# EAGLE board DAWA 6.1-MAIN (EAGLE 9.2.1), part 1 of 2
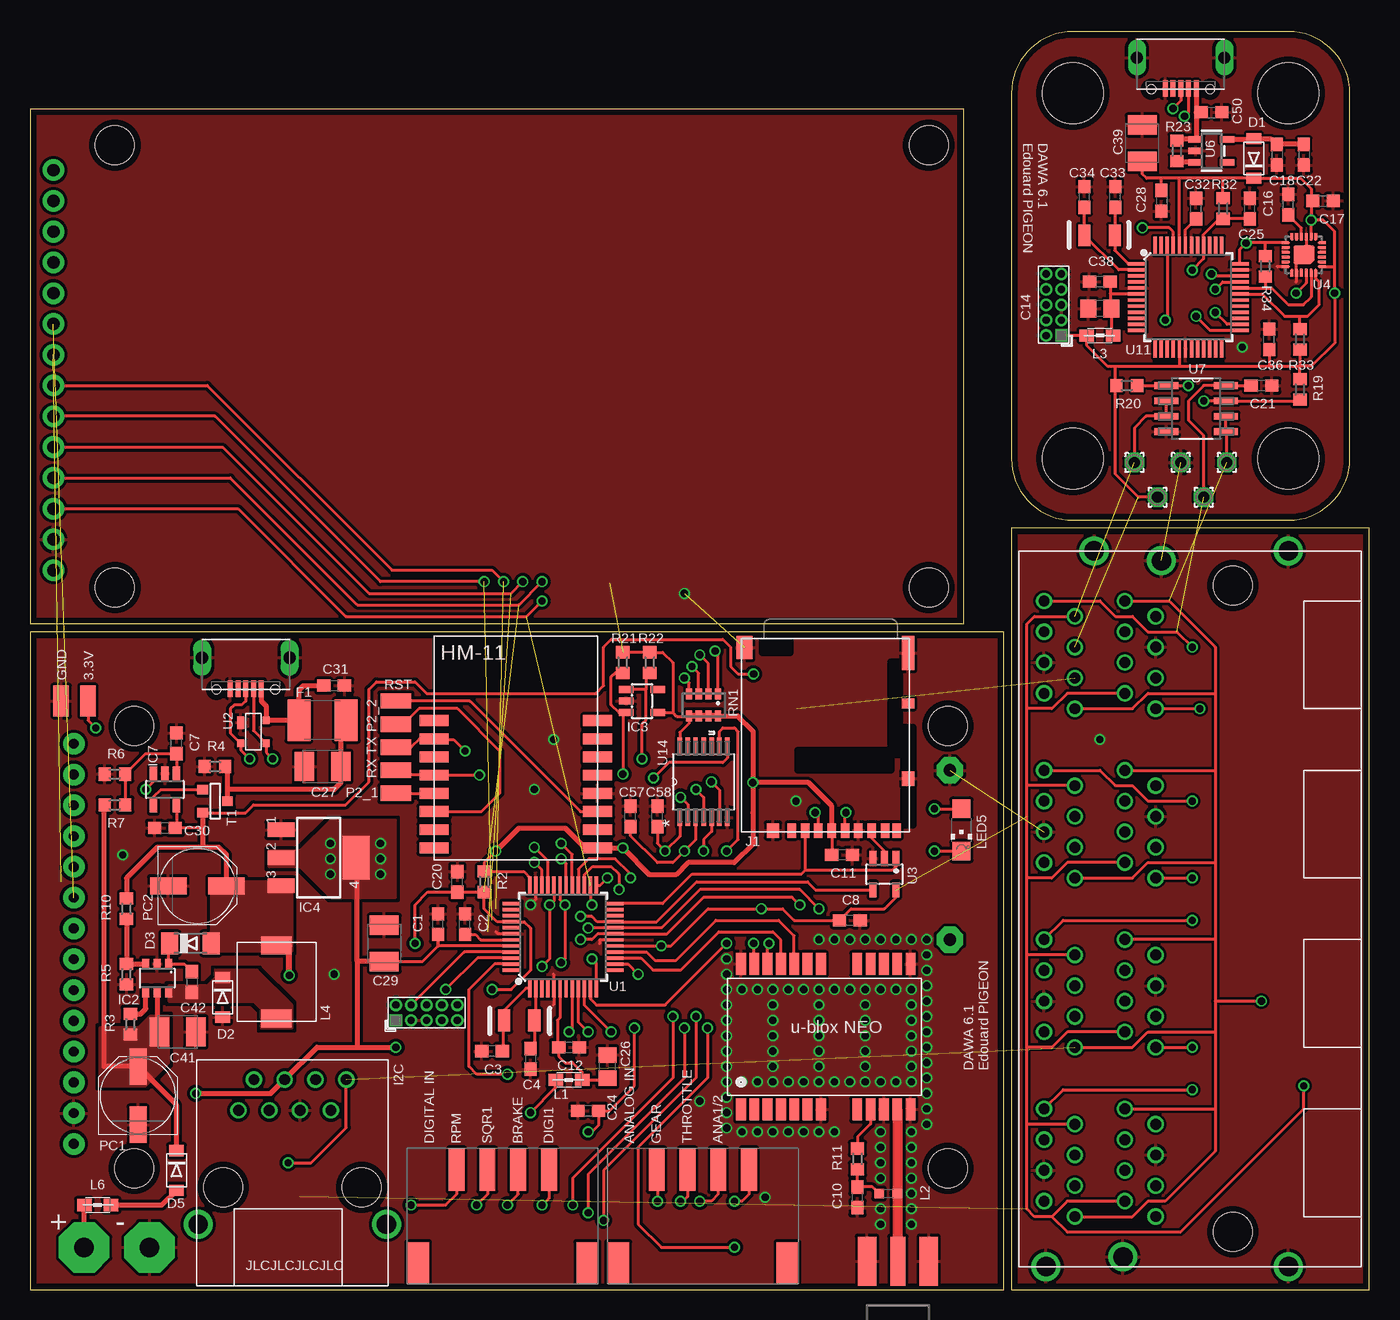
[diagram p0: board, top side]
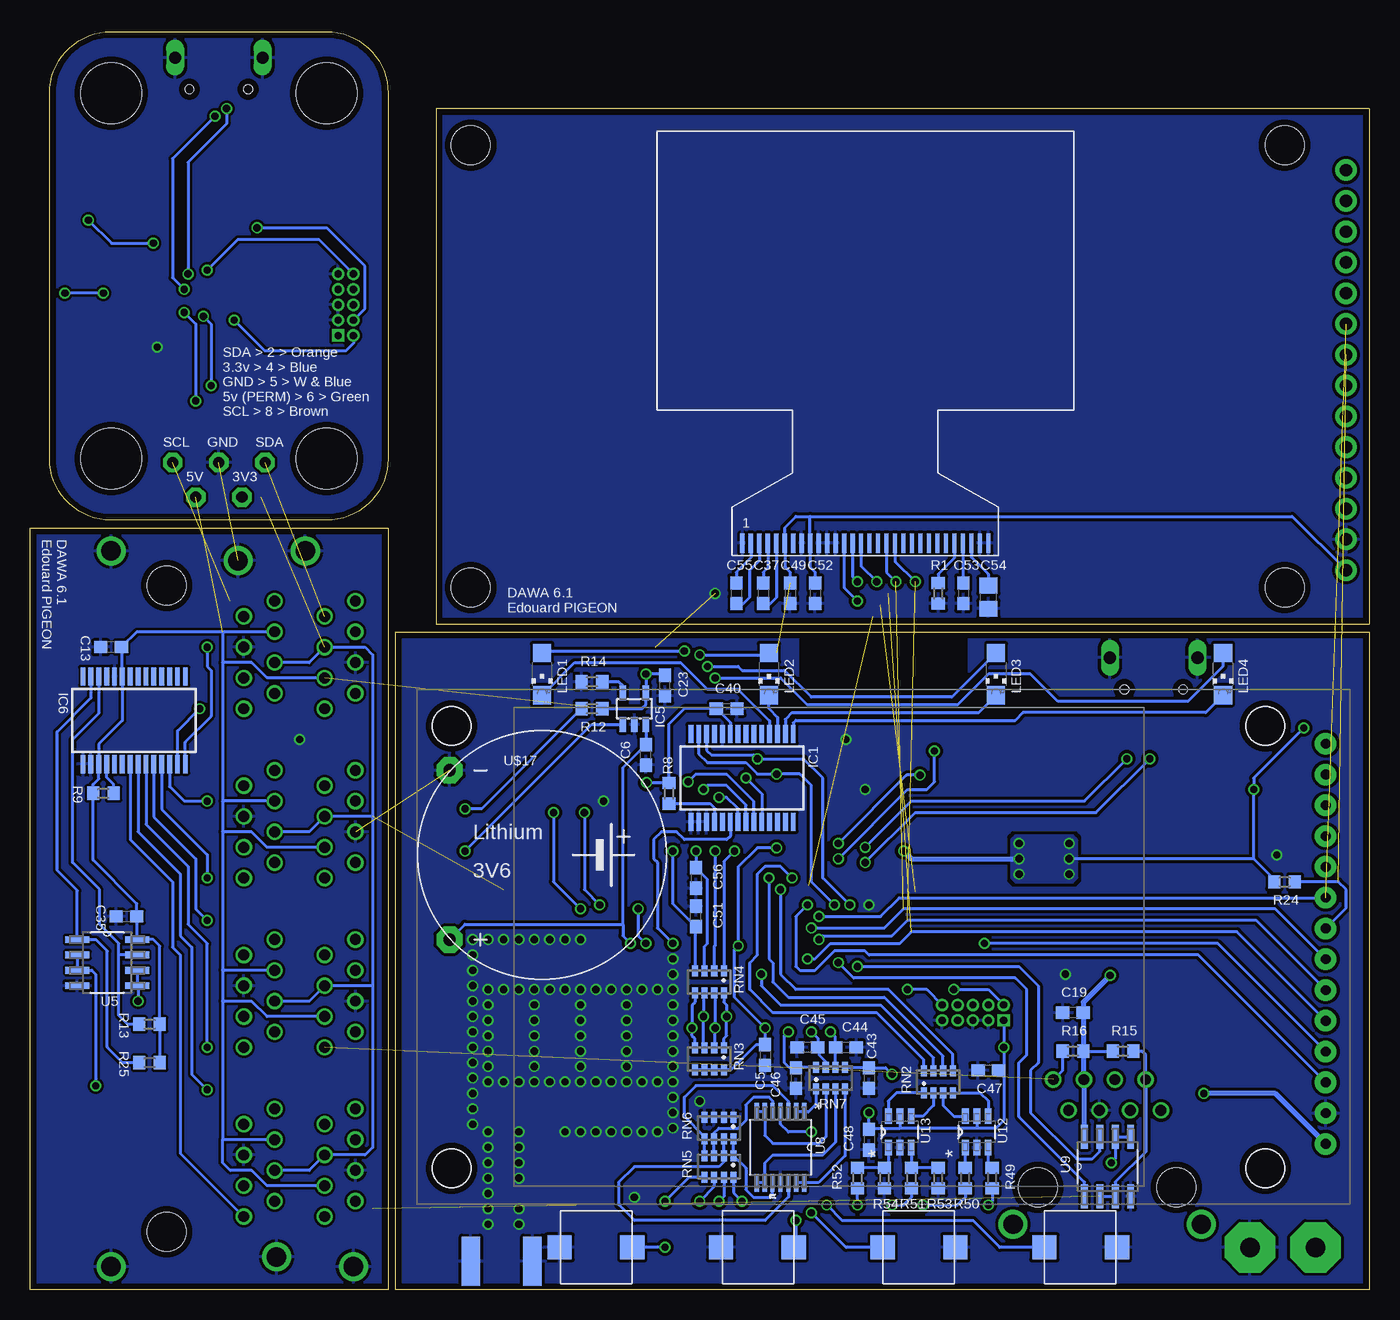
[diagram p1: board, bottom side, seen from below]

Size 110.49 x 103.82 mm. Coordinates in mm from the lower left corner, seen from the top.
Outline: 0.01,97.47 0.01,54.94
Outline: 0,97.47 76.99,97.47 76.99,54.93 0,54.93
Outline: 80.33,54.29 0.01,54.29 0.01,0.01 80.33,0.01 80.33,54.29
Outline: 80.96,62.87 80.96,0 110.49,0 110.49,62.87 80.96,62.87
Outline: 86.04,103.82 arc90 80.96,98.74 80.96,68.58 arc90 86.04,63.5 103.82,63.5 arc90 108.9,68.58 108.9,98.74 arc90 103.82,103.82 86.04,103.82
Copper layers (1*16): Top 0.035mm / dielectric 1.6mm / Bottom 0.035mm
Design rules "Elecrow_2-layer_PCB_eagle_rule *": minimum track width 6mil, minimum drill 12mil, track to track 6mil, track to pad 6mil, pad to pad 6mil, via to via 6mil, smd to smd 0mil, copper to edge 20mil, drill to drill 10mil, minimum pad ring 6mil, minimum via ring 6mil, stop-mask expansion 0mil, vias tented up to drill 100mil, thermal gap 10mil
Net classes: 0 default: width 0.203 mm, drill 0.406 mm, clearance 0.203 mm; 3 usbvcc: width 0.203 mm, drill 0.406 mm, clearance 0.203 mm; 4 USBpair: width 0.254 mm, drill 0.406 mm, clearance 0.61 mm
Holes 3.2 mm at 8.57,46.51 8.57,10 75.72,10 75.72,46.51 6.99,94.46 6.99,57.94 74.14,57.94 74.14,94.46
Holes 5 mm at 103.82,98.74 86.04,98.74 103.82,68.58 86.04,68.58

## Footprints (pad centres in the part's own frame; a part is rotated, then mirrored left to right if it is on the bottom)
SMD1,27-2,54 = smd 1.27 x 2.54: 1 0,0
4,16O1,6 = drill 1.6 pad 4.166 octagon: 1 0,0
C0603 = smd 1.1 x 1: 1 -0.85,0; 2 0.85,0
C0805 = smd 1.3 x 1.5: 1 -0.95,0; 2 0.95,0
SMC_B = smd 1.6 x 2.4: + -1.5,0; - 1.5,0
USB-MINIB-DAWA = smd 0.406 x 1.372: D+ 0,4.381; D- -0.641,4.381; GND 1.282,4.381; ID 0.641,4.381; VBUS -1.282,4.381 | drill 1 long: GND1 -3.612,1.826; GND2 3.612,1.826 | hole 0.7: -2.421,4.445; 2.421,4.445
SOD-123FL = smd 0.91 x 1.22: A 1.637,0; C -1.637,0
MINIMELF = smd 1.4 x 1.8: A 1.7,0; C -1.7,0
L1812 = smd 1.9 x 3.4: 1 -1.95,0; 2 1.95,0
SSOP28 = smd 0.4 x 1.5: 1 -4.225,-3.625; 2 -3.575,-3.625; 3 -2.925,-3.625; 4 -2.275,-3.625; 5 -1.625,-3.625; 6 -0.975,-3.625; 7 -0.325,-3.625; 8 0.325,-3.625; 9 0.975,-3.625; 10 1.625,-3.625; 11 2.275,-3.625; 12 2.925,-3.625; 13 3.575,-3.625; 14 4.225,-3.625; 15 4.225,3.625; 16 3.575,3.625; 17 2.925,3.625; 18 2.275,3.625; 19 1.625,3.625; 20 0.975,3.625; 21 0.325,3.625; 22 -0.325,3.625; 23 -0.975,3.625; 24 -1.625,3.625; 25 -2.275,3.625; 26 -2.925,3.625; 27 -3.575,3.625; 28 -4.225,3.625
SOT23-6 = smd 0.6 x 0.9: 1 -0.95,-1.15; 2 0,-1.15; 3 0.95,-1.15; 4 0.95,1.15; 5 0,1.15; 6 -0.95,1.15
SOT23-5L = smd 0.55 x 1.2: 1 -0.95,-1.3; 2 0,-1.3; 3 0.95,-1.3; 4 0.95,1.3; 5 -0.95,1.3
SOT223 = smd 1.219 x 2.235: 1 -2.311,-3.099; 2 0,-3.099; 3 2.311,-3.099 | smd 3.6 x 2.2: 4 0,3.099
SOT23-5 = smd 0.6 x 1.2: 1 -0.95,-1.306; 2 0,-1.306; 3 0.95,-1.306; 4 0.95,1.306; 5 -0.95,1.306
DM3AT-SF-PEJM5 = smd 0.7 x 1.2: 1 3.2,-0.1; 2 2.1,-0.1; 3 1,-0.1; 4 -0.1,-0.1; 5 -1.2,-0.1; 6 -2.3,-0.1; 7 -3.4,-0.1; 8 -4.5,-0.1; B -5.45,-0.1 | smd 1 x 0.8: A -6.4,-10.6 | smd 1 x 1.2: MOUNT0 4.75,-0.1; MOUNT1 -6.4,-4.4 | smd 1 x 2.8: MOUNT2 -6.4,-14.75 | smd 1.3 x 1.9: MOUNT3 7.1,-15.2
1X14-CB = drill 1.016 pad 1.778: 1 -16.51,0; 2 -13.97,0; 3 -11.43,0; 4 -8.89,0; 5 -6.35,0; 6 -3.81,0; 7 -1.27,0; 8 1.27,0; 9 3.81,0; 10 6.35,0; 11 8.89,0; 12 11.43,0; 13 13.97,0; 14 16.51,0
PINHEAD_2X05_127 = drill 0.6 pad 1.016 square: 1 -0.635,2.54 | drill 0.6 pad 1.016: 2 0.635,2.54; 3 -0.635,1.27; 4 0.635,1.27; 5 -0.635,0; 6 0.635,0; 7 -0.635,-1.27; 8 0.635,-1.27; 9 -0.635,-2.54; 10 0.635,-2.54
0805 = smd 1.2 x 1: 1 -1.1,0; 2 1.1,0
L0603 = smd 0.8 x 0.8: 1 -0.762,0; 2 0.762,0
SRR0604 = smd 1.5 x 2.5: P$1 3,0; P$2 -3,0
CHIPLED_1206 = smd 1.5 x 1.5: A 0,-1.75; C 0,1.75
1,6/0,9 = drill 0.914 pad 1.6 octagon: 1 0,0
PANASONIC_D = smd 3 x 1.4: + 2.4,0; - -2.4,0
R0603 = smd 1 x 1.1: 1 -0.85,0; 2 0.85,0
RJ45 = drill 1.6: P$1 5.08,0.13; P$2 5.08,15.67 | drill 0.9: P$3 17.02,11.075; P$4 17.02,3.455; P$5 17.02,5.995; P$6 14.48,4.725; P$7 14.48,7.265; P$8 14.48,12.345; P$9 14.48,9.805; P$10 17.02,8.535 | hole 3.2: 8.14,2.185; 8.14,13.615
742-8NS = smd 0.5 x 0.9: 1 -1.2,-0.9; 2 -0.4,-0.9; 3 0.4,-0.9; 4 1.2,-0.9; 5 1.2,0.9; 6 0.4,0.9; 7 -0.4,0.9; 8 -1.2,0.9
SOT-23 = smd 0.787 x 0.889: 1 0.025,-1.016; 2 -0.94,1.016; 3 0.991,1.016
TQFP-48 = smd 1.5 x 0.28: 1 -4.25,2.75; 2 -4.25,2.25; 3 -4.25,1.75; 4 -4.25,1.25; 5 -4.25,0.75; 6 -4.25,0.25; 7 -4.25,-0.25; 8 -4.25,-0.75; 9 -4.25,-1.25; 10 -4.25,-1.75; 11 -4.25,-2.25; 12 -4.25,-2.75; 25 4.25,-2.75; 26 4.25,-2.25; 27 4.25,-1.75; 28 4.25,-1.25; 29 4.25,-0.75; 30 4.25,-0.25; 31 4.25,0.25; 32 4.25,0.75; 33 4.25,1.25; 34 4.25,1.75; 35 4.25,2.25; 36 4.25,2.75 | smd 0.28 x 1.5: 13 -2.75,-4.25; 14 -2.25,-4.25; 15 -1.75,-4.25; 16 -1.25,-4.25; 17 -0.75,-4.25; 18 -0.25,-4.25; 19 0.25,-4.25; 20 0.75,-4.25; 21 1.25,-4.25; 22 1.75,-4.25; 23 2.25,-4.25; 24 2.75,-4.25; 37 2.75,4.25; 38 2.25,4.25; 39 1.75,4.25; 40 1.25,4.25; 41 0.75,4.25; 42 0.25,4.25; 43 -0.25,4.25; 44 -0.75,4.25; 45 -1.25,4.25; 46 -1.75,4.25; 47 -2.25,4.25; 48 -2.75,4.25
SOT-143B = smd 1 x 0.6: 1 -0.75,-1.05 | smd 0.6 x 0.6: 2 0.95,-1.05; 3 0.95,1.05; 4 -0.95,1.05
SOT23-5' = smd 0.55 x 1.2: 1 -0.95,-1.3; 2 0,-1.3; 3 0.95,-1.3; 4 0.95,1.3; 5 -0.95,1.3
QFN24_PAD = smd 0.5 x 0.25: 1 -1.55,1; 2 -1.55,0.6; 3 -1.55,0.2; 4 -1.55,-0.2; 5 -1.55,-0.6; 6 -1.55,-1; 13 1.55,-1; 14 1.55,-0.6; 15 1.55,-0.2; 16 1.55,0.2; 17 1.55,0.6; 18 1.55,1 | smd 0.08 x 0.13: 1$1 -1.32,1.06; 1$3 -1.26,0.94; P$33 1.26,-0.94; P$34 1.32,-1.06; P$58 1.26,0.94; P$59 1.32,1.06; P$68 -1.26,-0.94; P$69 -1.32,-1.06 | smd 0.1 x 0.185 rotated 45: 1$2 -1.25,1.024; P$49 1.024,-1.25 | smd 0.14 x 0.14: 1$4 -1.22,0.945; P$23 -0.945,-1.22; P$24 1.22,-0.945; P$36 0.945,1.22; P$51 0.945,-1.22; P$56 1.22,0.945; P$61 -0.945,1.22; P$66 -1.22,-0.945 | smd 0.05 x 0.05: 1$5 -1.175,0.97; P$25 -0.97,-1.175; P$31 1.175,-0.97; P$37 0.97,1.175; P$52 0.97,-1.175; P$57 1.175,0.97; P$62 -0.97,1.175; P$67 -1.175,-0.97 | smd 0.25 x 0.5: 7 -1,-1.55; 8 -0.6,-1.55; 9 -0.2,-1.55; 10 0.2,-1.55; 11 0.6,-1.55; 12 1,-1.55; 19 1,1.55; 20 0.6,1.55; 21 0.2,1.55; 22 -0.2,1.55; 23 -0.6,1.55; 24 -1,1.55 | smd 0.25 x 0.25: CENTER 0,0 | smd 0.4 x 0.4: DBBADFE -0.675,0.24 | smd 0.6 x 1.2: DBBADFE1 -0.575,-0.195 | smd 0.25 x 0.3: P$1 -0.2,1.3; P$3 0.2,1.3; P$5 0.6,1.3; P$11 -0.6,1.3; P$16 0.2,-1.3; P$18 -0.2,-1.3; P$20 -0.6,-1.3; P$26 0.6,-1.3 | smd 0.3 x 0.25: P$2 -1.3,0.2; P$4 -1.3,0.6; P$28 -1.3,-0.2; P$38 -1.3,-0.6; P$40 1.3,0.2; P$42 1.3,-0.2; P$44 1.3,-0.6; P$50 1.3,0.6 | smd 0.1 x 0.185 rotated 225: P$7 1.25,-1.024; P$60 -1.024,1.25 | smd 1.1 x 1.59: P$13 0.325,0 | smd 0.3 x 0.5 rotated 315: P$14 -0.592,0.512 | smd 0.5 x 1.59: P$15 -0.27,0 | smd 0.1 x 0.185 rotated 135: P$22 -1.024,-1.25; P$55 1.25,1.024 | smd 0.13 x 0.08: P$27 -0.94,-1.26; P$29 -1.06,-1.32; P$39 0.94,1.26; P$41 1.06,1.32; P$53 0.94,-1.26; P$54 1.06,-1.32; P$63 -0.94,1.26; P$64 -1.06,1.32 | smd 0.1 x 0.185 rotated 315: P$35 1.024,1.25; P$65 -1.25,-1.024
SOIC127P600X175-8N = smd 1.981 x 0.559: 1 -2.464,1.905; 2 -2.464,0.635; 3 -2.464,-0.635; 4 -2.464,-1.905; 5 2.464,-1.905; 6 2.464,-0.635; 7 2.464,0.635; 8 2.464,1.905
SOP65P640X120-14N = smd 1.473 x 0.356: 1 -2.921,1.956; 2 -2.921,1.295; 3 -2.921,0.66; 4 -2.921,0; 5 -2.921,-0.66; 6 -2.921,-1.295; 7 -2.921,-1.956; 8 2.921,-1.956; 9 2.921,-1.295; 10 2.921,-0.66; 11 2.921,0; 12 2.921,0.66; 13 2.921,1.295; 14 2.921,1.956
SOT95P280X145-6N = smd 1.27 x 0.559: 1 -1.295,0.94; 2 -1.295,0; 3 -1.295,-0.94; 4 1.295,-0.94; 5 1.295,0; 6 1.295,0.94
OSCILLATOR_SMD = smd 1 x 1.8: 1 0,0; 2 2.5,0
HM-11 = smd 2.4 x 0.9: GND 6.5,0; NC@5 -7,0; NC@6 -7,-1.5; NC@7 -7,-3; NC@8 -7,-4.5; NC@10 6.5,-3; PIO0 6.5,6; PIO1 6.5,4.5; PIO2 6.5,3; PIO3 6.5,1.5; RESETB 6.5,-1.5; UART_CTS -7,3; UART_RTS -7,6; UART_RX -7,1.5; UART_TX -7,4.5; VCC 6.5,-4.5
NEO-M8 = smd 1.8 x 0.8: 1 6.4,-7.4; 2 6.4,-6.3; 3 6.4,-5.2; 4 6.4,-4.1; 5 6.4,-3; 6 6.4,-1.9; 7 6.4,-0.8; 8 6.4,2.2; 9 6.4,3.3; 10 6.4,4.4; 11 6.4,5.5; 12 6.4,6.6; 13 -5.6,6.6; 14 -5.6,5.5; 15 -5.6,4.4; 16 -5.6,3.3; 17 -5.6,2.2; 18 -5.6,-0.8; 19 -5.6,-1.9; 20 -5.6,-3; 21 -5.6,-4.1; 22 -5.6,-5.2; 23 -5.6,-6.3; 24 -5.6,-7.4
TFT_2.4 = drill 0.8 pad 1.778: TFT_CS -32.42,2; TFT_DC -27.34,2; TFT_GND -34.96,2; TFT_LED -19.72,2; TFT_RESET -29.88,2; TFT_SCK -22.26,2; TFT_SDI(MOSI) -24.8,2; TFT_SDO(MISO) -17.18,2; TFT_T_CLK -14.64,2; TFT_T_CS -12.1,2; TFT_T_DIN -9.56,2; TFT_T_DO -7.02,2; TFT_T_IRQ -4.48,2; TFT_VCC -37.5,2
SKPMAPE10 = smd 2 x 2: P$1 -3,0; P$2 3,0
4_PIN_JST-XH-SMD = smd 1.3 x 3.5: 1 6.604,-0.254; 2 4.064,-0.254; 3 1.524,-0.254; 4 -1.016,-0.254 | smd 1.8 x 3.4: P$1 9.779,-7.938; P$2 -4.191,-7.938
1X30-0.7MM = smd 0.35 x 1.6: 1 -10.15,0; 2 -9.45,0; 3 -8.75,0; 4 -8.05,0; 5 -7.35,0; 6 -6.65,0; 7 -5.95,0; 8 -5.25,0; 9 -4.55,0; 10 -3.85,0; 11 -3.15,0; 12 -2.45,0; 13 -1.75,0; 14 -1.05,0; 15 -0.35,0; 16 0.35,0; 17 1.05,0; 18 1.75,0; 19 2.45,0; 20 3.15,0; 21 3.85,0; 22 4.55,0; 23 5.25,0; 24 5.95,0; 25 6.65,0; 26 7.35,0; 27 8.05,0; 28 8.75,0; 29 9.45,0; 30 10.15,0
LI_3.6 = drill 1.016 pad 2.159 octagon: + -7.62,-6.985; - -7.62,6.985
RJ45X8 = drill 0.9: P$1 13.018,22.701; P$2 11.748,20.161; P$3 10.477,22.701; P$4 9.207,20.161; P$5 7.938,22.701; P$6 6.668,20.161; P$7 5.397,22.701; P$8 4.128,20.161; P$9 26.988,22.701; P$10 25.718,20.161; P$11 24.448,22.701; P$12 23.177,20.161; P$13 21.907,22.701; P$14 20.637,20.161; P$15 19.367,22.701; P$16 18.098,20.161; P$17 40.958,22.701; P$18 39.688,20.161; P$19 38.417,22.701; P$20 37.148,20.161; P$21 35.877,22.701; P$22 34.608,20.161; P$23 33.337,22.701; P$24 32.068,20.161; P$25 54.928,22.701; P$26 53.657,20.161; P$27 52.388,22.701; P$28 51.117,20.161; P$29 49.847,22.701; P$30 48.578,20.161; P$31 47.307,22.701; P$32 46.038,20.161; P$33 4.128,13.494; P$34 5.397,16.034; P$35 6.668,13.494; P$36 7.938,16.034; P$37 9.207,13.494; P$38 10.477,16.034; P$39 11.748,13.494; P$40 13.018,16.034; P$41 18.098,13.494; P$42 19.367,16.034; P$43 20.637,13.494; P$44 21.907,16.034; P$45 23.177,13.494; P$46 24.448,16.034; P$47 25.718,13.494; P$48 26.988,16.034; P$49 32.068,13.494; P$50 33.337,16.034; P$51 34.608,13.494; P$52 35.877,16.034; P$53 37.148,13.494; P$54 38.417,16.034; P$55 39.688,13.494; P$56 40.958,16.034; P$57 46.038,13.494; P$58 47.307,16.034; P$59 48.578,13.494; P$60 49.847,16.034; P$61 51.117,13.494; P$62 52.388,16.034; P$63 53.657,13.494; P$64 54.928,16.034 | drill 1.6: P$67 0,22.543; P$68 0.794,16.192; P$69 0,2.54; P$70 59.055,2.54; P$71 58.261,13.018; P$72 59.055,18.574 | hole 3.2: 2.857,7.144; 56.197,7.144
SMA_EDGELAUNCH = smd 4.064 x 1.524: GND@1 2.032,-2.54; GND@2 2.032,2.54 | smd 4.064 x 1.524 bottom: GND@3 2.032,2.54; GND@4 2.032,-2.54 | smd 4.064 x 1.27: P 2.032,0

## Placement (x,y rotation side)
3.3V  WIREPADSMD1,27-254  [SMD1,27-2,54]  4.76,48.58 180 top
+  WIREPAD4,16O1,6  [4,16O1,6]  4.45,3.49 0 top
-  WIREPAD4,16O1,6  [4,16O1,6]  9.84,3.49 0 top
C1  100nF  [C0603]  33.66,30.16 90 top
C2  100nF  [C0603]  35.88,30.16 90 top
C3  22pF  [C0603]  38.1,19.68 180 top
C4  22pF  [C0603]  41.27,19.05 270 top
C5  100nF  [C0603]  49.85,19.37 270 bottom
C6  4.7µF  [C0603]  59.69,44.13 90 bottom
C7  100nF  [C0603]  12.06,45.09 90 top
C8  4.7µF  [C0603]  67.63,30.48 180 top
C10  47pF  [C0603]  68.26,7.62 90 top
C11  100nF  [C0603]  66.99,35.88 180 top
C12  100nF  [C0603]  44.45,20 0 top
C13  100nF  [C0603]  103.82,53.02 180 bottom
C14  10µF  [C0805]  88.27,80.96 180 top
C16  100nF  [C0603]  103.82,89.53 90 top
C17  100nF  [C0603]  106.68,89.85 0 top
C18  10µF  [C0603]  102.87,93.66 270 top
C19  100nF  [C0603]  24.45,22.86 180 bottom
C20  100nF  [C0603]  35.24,33.66 90 top
C21  100nF  [C0603]  101.6,74.61 0 top
C22  1µF  [C0603]  105.09,93.66 270 top
C23  4.7µF  [C0603]  58.1,49.85 90 bottom
C24  100nF  [C0603]  46.04,14.76 0 top
C25  100nF  [C0603]  100.65,89.22 90 top
C26  10µF  [C0805]  47.62,18.41 90 top
C27  10µF  [SMC_B]  24.13,43.18 180 top
C28  100nF  [C0603]  93.34,89.85 270 top
C29  10µF  [SMC_B]  29.21,28.57 90 top
C30  100nF  [C0603]  11.11,38.1 180 top
C31  10nF  [C0603]  25.08,49.85 0 top
C32  1µF  [C0603]  96.2,89.22 90 top
C33  22pF  [C0603]  89.53,90.17 90 top
C34  22pF  [C0603]  87,90.17 90 top
C35  100nF  [C0603]  102.55,30.8 180 bottom
C36  100nF  [C0603]  102.23,78.42 90 top
C37  2.2µF  [C0603]  50.01,57.47 270 bottom
C38  100nF  [C0603]  88.27,83.19 180 top
C39  10µF  [SMC_B]  91.76,94.61 90 top
C40  100nF  [C0603]  53.02,47.94 0 bottom
C41  10µF  [SMC_B]  12.15,21.27 0 top
C42  10nF  [C0603]  13.34,25.4 270 top
C43  470pF  [C0603]  41.27,17.46 270 bottom
C44  470pF  [C0603]  43.18,20 0 bottom
C45  470pF  [C0603]  46.35,20 180 bottom
C46  470pF  [C0603]  47.31,17.46 270 bottom
C47  100nF  [C0603]  31.43,18.1 180 bottom
C48  100nF  [C0603]  41.27,12.38 270 bottom
C49  2.2µF  [C0603]  47.78,57.47 270 bottom
C50  10µF  [C0603]  97.47,97.16 0 top
C51  100nF  [C0603]  55.56,30.8 90 bottom
C52  2.2µF  [C0603]  45.72,57.47 270 bottom
C53  2.2µF  [C0603]  33.5,57.47 270 bottom
C54  10µF  [C0805]  31.43,57.15 90 bottom
C55  2.2µF  [C0603]  52.23,57.47 270 bottom
C56  100nF  [C0603]  55.56,33.97 270 bottom
C57  100nF  [C0603]  49.53,39.05 90 top
C58  100nF  [C0603]  51.75,39.05 90 top
CN1  [USB-MINIB-DAWA]  94.93,103.5 180 top
CN2  [USB-MINIB-DAWA]  17.78,53.98 180 top
D1  MBR120  [SOD-123FL]  100.97,93.34 90 top
D2  MBR120  [SOD-123FL]  15.88,24.13 270 top
D3  CD1206-S01575  [MINIMELF]  13.22,28.57 0 top
D5  MBR120  [SOD-123FL]  12.06,9.84 270 top
F1  MF-MSMF050-2 500mA  [L1812]  24.13,46.99 180 top
GND  WIREPADSMD1,27-254  [SMD1,27-2,54]  2.54,48.58 0 top
IC1  MCP23017SS  [SSOP28]  51.75,42.23 180 bottom
IC2  LM2734Y  [SOT23-6]  10.48,25.72 180 top
IC3  24AA02E48  [SOT23-5L]  50.48,48.58 270 top
IC4  NCP1117ST33T3G-3V3  [SOT223]  23.79,35.65 270 top
IC5  MCP73831/OT  [SOT23-5L]  60.64,47.94 0 bottom
IC6  MCP23017SS  [SSOP28]  101.92,46.99 180 bottom
IC7  LMV321M5  [SOT23-5]  11.11,41.27 180 top
J1  DM3AT-SF-PEJM5  [DM3AT-SF-PEJM5]  66.04,37.78 180 top
JP2  [1X14-CB]  1.91,75.88 90 top
JTAG  [PINHEAD_2X05_127]  32.7,22.86 90 top
JTAG1  [PINHEAD_2X05_127]  84.45,81.28 180 top
L1  MH2029-300Y  [0805]  44.45,17.3 0 top
L2  27nH  [L0603]  70.8,7.94 0 top
L3  MH2029-300Y  [0805]  88.27,78.74 0 top
L4  10u SRR0604-100ML  [SRR0604]  20.32,25.4 270 top
L6  MH2029-300Y  [0805]  5.56,6.99 180 top
LED1  [CHIPLED_1206]  68.26,50.8 180 bottom
LED2  [CHIPLED_1206]  49.53,50.8 180 bottom
LED3  [CHIPLED_1206]  30.8,50.8 180 bottom
LED4  [CHIPLED_1206]  12.06,50.8 180 bottom
LED5  [CHIPLED_1206]  76.83,37.94 180 top
P2_1  [SMD1,27-2,54]  30.16,40.96 90 top
P2_2  WIREPADSMD1,27-254  [SMD1,27-2,54]  30.16,46.67 90 top
PAD1  [1,6/0,9]  98.74,68.26 0 top
PAD2  [1,6/0,9]  96.84,65.41 0 top
PAD3  [1,6/0,9]  94.93,68.26 0 top
PAD4  [1,6/0,9]  93.03,65.41 0 top
PAD5  [1,6/0,9]  91.12,68.26 0 top
PC1  47µF  [PANASONIC_D]  8.89,16.02 90 top
PC2  47µF  [PANASONIC_D]  13.79,33.34 0 top
R1  390k  [R0603]  35.56,57.47 90 bottom
R2  10k  [R0603]  37.47,33.66 90 top
R3  10k  [R0603]  8.26,21.91 90 top
R4  10k  [R0603]  15.24,43.18 0 top
R5  10k  [R0603]  7.94,26.04 90 top
R6  100k  [R0603]  6.99,42.55 180 top
R7  100k  [R0603]  6.99,40.01 0 top
R8  10k  [R0603]  57.78,40.96 90 bottom
R9  10k  [R0603]  104.46,40.96 180 bottom
R10  52k3  [R0603]  7.94,31.43 90 top
R11  10  [R0603]  68.26,10.79 270 top
R12  330  [R0603]  64.14,47.94 0 bottom
R13  4.7k  [R0603]  100.65,21.91 180 bottom
R14  27k  [R0603]  64.14,50.16 180 bottom
R15  1k  [R0603]  20.32,19.68 0 bottom
R16  1k  [R0603]  24.45,19.68 180 bottom
R19  4.7k  [R0603]  104.78,74.3 270 top
R20  4.7k  [R0603]  90.49,74.61 0 top
R21  4.7k  [R0603]  48.9,51.75 270 top
R22  4.7k  [R0603]  51.12,51.75 270 top
R23  100k  [R0603]  94.61,93.98 90 top
R24  330  [R0603]  6.99,33.66 180 bottom
R25  4.7k  [R0603]  100.65,18.73 180 bottom
R32  10k  [R0603]  98.42,89.22 90 top
R33  4.7k  [R0603]  104.78,78.42 90 top
R34  4.7k  [R0603]  101.92,84.45 270 top
R49  4.7k  [R0603]  31.11,9.21 90 bottom
R50  4.7k  [R0603]  33.34,9.21 90 bottom
R51  1.8k  [R0603]  37.78,9.21 90 bottom
R52  1.8k  [R0603]  42.23,9.21 90 bottom
R53  1k  [R0603]  35.56,9.21 90 bottom
R54  1k  [R0603]  40.01,9.21 90 bottom
RJ45_MAIN_BOARD  RJ45  [RJ45]  29.53,0.32 90 top
RN1  100  [742-8NS]  55.56,48.26 180 top
RN2  510  [742-8NS]  35.56,17.14 0 bottom
RN3  10k  [742-8NS]  54.45,19.05 180 bottom
RN4  10k  [742-8NS]  54.45,25.4 180 bottom
RN5  4.7k  [742-8NS]  53.66,10.16 180 bottom
RN6  9.1k  [742-8NS]  53.66,13.34 180 bottom
RN7  510  [742-8NS]  44.45,17.46 0 bottom
RST  WIREPADSMD1,27-254  [SMD1,27-2,54]  30.16,48.58 90 top
RX  [SMD1,27-2,54]  30.16,42.86 90 top
T1  FDN340P  [SOT-23]  15.25,40.28 90 top
TX  [SMD1,27-2,54]  30.16,44.77 90 top
U1  ATSAMD21G-A  [TQFP-48]  43.96,29.12 90 top
U2  PRTR5V0U2X  [SOT-143B]  18.41,46.04 270 top
U3  74AHC1G125  [SOT23-5']  70.48,34.29 180 top
U4  MPU-9250  [QFN24_PAD]  105.09,85.41 180 top
U5  P82B96D  [SOIC127P600X175-8N]  104.14,26.99 0 bottom
U6  AP2112K-3.3  [SOT23-5']  97.47,93.98 270 top
U7  P82B96D  [SOIC127P600X175-8N]  96.2,72.71 0 top
U8  TLV2374  [SOP65P640X120-14N]  48.58,11.75 270 bottom
U9  P82B96D  [SOIC127P600X175-8N]  21.59,10.16 90 bottom
U11  ATSAMD21G-A  [TQFP-48]  95.57,81.92 0 top
U12  SN74LVC2G17DBVR  [SOT95P280X145-6N]  32.38,13.02 90 bottom
U13  SN74LVC2G17DBVR  [SOT95P280X145-6N]  38.73,13.02 90 bottom
U14  CD40106BPW  [SOP65P640X120-14N]  55.56,41.91 90 top
U$1  OSCILLATOR_32KHZ  [OSCILLATOR_SMD]  41.59,22.23 180 top
U$2  HM-11  [HM-11]  40.32,40.96 0 top
U$3  NEO-M8  [NEO-M8]  66.04,21.27 270 top
U$4  TFT_2.4  [TFT_2.4]  1.59,49.53 90 bottom
U$5  SKPMAPE10  [SKPMAPE10]  63.82,3.49 0 bottom
U$6  SKPMAPE10  [SKPMAPE10]  50.48,3.49 0 bottom
U$7  SKPMAPE10  [SKPMAPE10]  37.15,3.49 180 bottom
U$8  SKPMAPE10  [SKPMAPE10]  23.81,3.49 180 bottom
U$9  4_PIN_JST-XH-SMD  [4_PIN_JST-XH-SMD]  36.2,10.16 0 top
U$14  OSCILLATOR_32KHZ  [OSCILLATOR_SMD]  87,87 0 top
U$15  4_PIN_JST-XH-SMD  [4_PIN_JST-XH-SMD]  52.7,10.16 0 top
U$16  UG-2864HSWEG01  [1X30-0.7MM]  41.58,61.59 0 bottom
U$17  LI_3.6  [LI_3.6]  68.26,35.88 0 bottom
U$18  RJ45X8  [RJ45X8]  106.36,1.91 90 top
X1  [SMA_EDGELAUNCH]  71.6,0.32 90 top

## Library data of the parts
3.3V + - GND P2_1 P2_2 PAD1-PAD5 RST RX TX = wirepad
C1-C5 C7 C12-C14 C16-C18 C20 C22 C25 C26 C28-C34 C36-C38 C40-C46 C49 C50 C52-C55 PC1 PC2 = rcl; SPICEPREFIX: C
C6 C8 C10 C11 C19 C21 C23 C24 C27 C35 C39 C47 C48 C51 C56-C58 F1 = rcl
CN1 CN2 U$4-U$8 U$16 U$17 = DAWA
D1 D2 D5 IC1 IC5 IC6 JP2 LED1-LED5 X1 = adafruit
D3 = diode
IC2 L4 = SmartPrj
IC3 = microchip; MF: MICROCHIP; MPN: 24AA00T-I/OTG; OC_FARNELL: 1331264; OC_NEWARK: 89H3038
IC4 IC7 = linear
J1 = connector-hirose; DIGIKEY: HR1964CT-ND
JTAG JTAG1 = Arduino_Wifi_shield_v018_tG
L1 L3 L6 = wuerth-elektronik
L2 = rc-master-smd
R1-R11 R23 R32 = rcl; SPICEPREFIX: R
R12-R16 R19-R22 R24 R25 R33 R34 R49-R54 = resistor
RJ45_MAIN_BOARD U$18 = RJ45 Jack
RN1-RN7 = resistor-array
T1 = zetex; OC_FARNELL: unknown; OC_NEWARK: unknown
U1 U11 = SparkFun-IC-Microcontroller; PROD_ID: IC-13064
U2 = Volks73-NXPSemiconductors; APPLICATIONS: General Purpose; BIDIRECTIONAL_CHANNELS: 2; CAPACITANCE: 1pF @ 1MHz; CURRENT_PEAK_PULSE: -; DESCRIPTION: TVS DIODE 5.5VWM SOT143B; DOCUMENTATION_LINK: <a href="http://www.nxp.com/documents/data_sheet/PRTR5V0U2X.pdf">Datasheet</a>; DOCUMENTATION_URL: http://www.nxp.com/documents/data_sheet/PRTR5V0U2X.pdf; MANUFACTURER: NXP Semiconductors; MOUNTING_TYPE: Surface Mount; OPERATING_TEMPERATURE: -40C ~ 85C; PART_NUMBER: PRTR5V0U2X,215; POWER-PEAK_PULSE: -; POWER_LINE_PROTECTION: Yes; SUPPLIER_ITEM_LINK: <a href="http://www.digikey.com/product-detail/en/PRTR5V0U2X,215/568-4140-1-ND/1589981">Details</a>; SUPPLIER_ITEM_NUMBER: 568-4140-1-ND; SUPPLIER_ITEM_URL: http://www.digikey.com/product-detail/en/PRTR5V0U2X,215/568-4140-1-ND/1589981; SUPPLIER_LINK: <a href="http://www.digikey.com">Home Page</a>; SUPPLIER_NAME: Digi-Key; SUPPLIER_URL: http://www.digikey.com; TYPE: Steering (Rail to Rail); UNIDIRECTIONAL_CHANNELS: -; VOLTAGE_BREAKDOWN: 6V; VOLTAGE_CLAMPING: -; VOLTAGE_REVERSE: 5.5V
U3 = 74ah
U4 = Testing; PROD_ID: IC-13192
U5 U7 U9 = TI; MPN: P82B96D; OC_FARNELL: 1831235; OC_NEWARK: 88K6383; PACKAGE: SOIC-8; SUPPLIER: Texas Instruments
U6 = microbuilder
U8 = TI; MPN: TLV2374IPWR; OC_FARNELL: 1575640; OC_NEWARK: 76C7986; PACKAGE: SOIC-14; SUPPLIER: Texas Instruments
U12 U13 = TI; MPN: SN74LVC2G17DBVR; OC_FARNELL: 1470776; OC_NEWARK: 76C4207; PACKAGE: SOT-23-6; SUPPLIER: Texas Instruments
U14 = TI; MPN: CD40106BPW; OC_FARNELL: 1741145; OC_NEWARK: 34R6794; PACKAGE: TSSOP-14; SUPPLIER: Texas Instruments
U$1 U$14 = kanflo
U$2 = hm-11
U$3 = ubloxLib
U$9 U$15 = JST-XH_HEADERS

## Nets
+3V3: 3.3V.1 C1.1 C5.1 C8.2 C11.2 C17.1 C24.2 C28.1 C29.+ C36.1 C39.+ C40.1 C47.1 C48.1 C49.1 C52.1 D1.C IC1.9 IC3.4 IC4.2 IC4.4 IC7.3 J1.4 JP2.1 JTAG1.1 JTAG.1 L1.1 L3.1 PAD4.1 R2.2 R8.2 R19.1 R20.1 R21.1 R22.1 R24.2 R32.2 R33.1 R34.1 RJ45_MAIN_BOARD.P$10 RN1.5 RN1.6 RN1.7 RN1.8 RN3.5 RN3.6 RN3.7 RN3.8 U1.17 U1.36 U1.44 U3.5 U4.1 U4.8 U4.13 U4.22 U8.4 U11.17 U11.36 U11.44 U12.5 U13.5 U14.14 U$2.VCC U$3.23 U$4.TFT_VCC U$16.6 U$16.9 U$18.P$4 U$18.P$12 U$18.P$20 U$18.P$28 U$18.P$36 U$18.P$44 U$18.P$52 U$18.P$60
+5V: C13.1 C19.1 C21.1 C23.2 C30.1 C35.1 D3.A IC4.3 IC5.4 IC6.9 IC6.17 IC7.5 L4.P$2 PAD2.1 PC2.+ R9.2 R10.2 R12.2 R13.1 R15.1 R16.1 R25.1 RJ45_MAIN_BOARD.P$5 T1.2 U5.8 U7.8 U9.8 U$18.P$6 U$18.P$14 U$18.P$22 U$18.P$30 U$18.P$38 U$18.P$46 U$18.P$54 U$18.P$62
A2: C44.1 RN7.6 U1.8
A3: C45.1 RN7.7 U1.9
A4: C46.1 RN7.8 U1.10
A5: C43.1 RN7.5 U1.47
ALIM+: +.1 L6.2
ANA1_IN: RN5.6 U$15.2
ANA2_IN: RN5.5 U$15.1
BOOST: C42.1 D3.C IC2.1
BRAKE_IN: R51.1 U$9.2
CMP: C7.1 IC7.1 R6.1 R7.2
D3: RN2.7 U1.14
D4: U1.13
D5: J1.2 U1.24 U3.1
D6: RX.1 U1.29 U$2.UART_RX
D7: TX.1 U1.30 U$2.UART_TX
D10: RN2.5 U1.27
D12: RN2.6 U1.28
DIGI1_OPT: RN2.8 U1.25
DIGI1_OPT_IN: R52.1 U$9.1
EN: IC2.4 R3.2
FB: IC2.3 R5.2 R10.1
GATE_CMD: IC7.4 T1.3
GEAR_IN: RN5.8 U$15.4
GND: -.1 C1.2 C2.2 C3.2 C4.2 C5.2 C6.1 C7.2 C8.1 C10.1 C11.1 C12.2 C13.2 C14.2 C16.2 C17.2 C18.2 C19.2 C20.2 C21.2 C22.2 C23.1 C24.1 C25.2 C26.2 C27.- C28.2 C29.- C30.2 C31.2 C32.2 C33.2 C34.2 C35.2 C36.2 C38.2 C39.- C40.2 C41.- C43.2 C44.2 C45.2 C46.2 C47.2 C48.2 C49.2 C50.2 C51.2 C52.2 C53.2 C54.1 C56.2 C57.2 C58.2 CN1.GND CN1.GND1 CN1.GND2 CN2.GND CN2.GND1 CN2.GND2 D2.A GND.1 IC1.10 IC1.15 IC1.16 IC1.17 IC2.2 IC3.2 IC4.1 IC5.2 IC6.10 IC6.15 IC6.16 IC7.2 J1.6 J1.MOUNT0 J1.MOUNT1 J1.MOUNT2 J1.MOUNT3 JP2.2 JTAG1.3 JTAG1.5 JTAG1.9 JTAG.3 JTAG.5 JTAG.9 PAD3.1 PC1.- PC2.- R1.1 R4.1 R5.1 R6.2 R14.2 R53.1 R54.1 RJ45_MAIN_BOARD.P$7 RN6.1 RN6.2 RN6.3 RN6.4 U1.5 U1.18 U1.35 U1.42 U2.1 U3.3 U4.9 U4.18 U4.20 U4.CENTER U5.4 U6.2 U7.4 U8.11 U9.4 U11.5 U11.18 U11.35 U11.42 U12.2 U13.2 U14.7 U$2.GND U$3.7 U$3.10 U$3.12 U$3.13 U$3.24 U$4.TFT_GND U$5.P$1 U$6.P$1 U$7.P$1 U$8.P$1 U$16.1 U$16.8 U$16.10 U$16.11 U$16.12 U$16.29 U$16.30 U$17.- U$18.P$5 U$18.P$13 U$18.P$21 U$18.P$29 U$18.P$37 U$18.P$45 U$18.P$53 U$18.P$61 U$18.P$67 U$18.P$68 U$18.P$69 U$18.P$70 U$18.P$71 U$18.P$72 X1.GND@1 X1.GND@2 X1.GND@3 X1.GND@4
LCD_CS: JP2.3 U1.26 U$4.TFT_CS U$16.13
LCD_DC: JP2.5 U1.12 U$4.TFT_DC U$16.15
MASTER-RESET: C20.1 JP2.4 JTAG.10 R2.1 U1.40 U$4.TFT_RESET U$16.14
MASTER-RESET_N2: C25.1 JTAG1.10 R32.1 U11.40
MCP1_INT: IC1.20 U1.11
MISO: JP2.9 U1.21 U3.4 U$4.TFT_SDO(MISO)
MOSI: J1.3 JP2.6 U1.19 U$4.TFT_SDI(MOSI) U$16.19
N$1: C2.1 U1.43
N$2: C3.1 U1.1 U$1.2
N$3: C4.1 U1.2 U$1.1
N$4: RN5.4 RN6.5 U8.3
N$5: IC1.1 LED4.C
N$6: IC5.1 LED5.C
N$7: IC1.2 LED3.C
N$8: LED5.A R12.1
N$9: C32.1 U11.43
N$10: D5.A L6.1
N$11: C10.2 L2.1 R11.2
N$12: IC5.5 R14.1
N$13: J1.7 U3.2
N$14: P2_1.1 U$2.NC@5
N$15: RST.1 U$2.RESETB
N$16: C33.1 U11.1 U$14.2
N$17: C34.1 U11.2 U$14.1
N$18: P2_2.1 U$2.NC@6
N$19: R11.1 U$3.9
N$20: L2.2 U$3.11 X1.P
N$21: RN5.3 RN6.6 U8.5
N$22: IC1.3 LED2.C
N$23: IC1.4 LED1.C
N$24: RN7.1 U8.1 U8.2
N$25: RN7.2 U8.6 U8.7
N$26: RN7.3 U8.8 U8.9
N$27: RN7.4 U8.13 U8.14
N$28: RN5.2 RN6.7 U8.12
N$29: LED4.A RN1.4
N$30: LED3.A RN1.3
N$31: RN5.1 RN6.8 U8.10
N$32: LED2.A RN1.2
N$33: LED1.A RN1.1
N$34: IC1.18 R8.1
N$35: IC6.28 U$18.P$25
N$36: RN2.3 U12.6
N$37: RN3.4 RN4.5 U$5.P$2
N$38: RN3.3 RN4.6 U$6.P$2
N$39: IC6.26 U$18.P$17
N$40: IC6.24 U$18.P$9
N$41: R50.2 U12.1
N$42: R49.2 U12.3
N$43: R51.2 R53.2 U13.3
N$44: R52.2 R54.2 U13.1
N$45: RN2.1 U13.6
N$46: RN2.2 U13.4
N$47: R23.1 U6.3
N$48: JP2.8 R24.1 U$4.TFT_LED
N$49: RN2.4 U12.4
N$50: RN3.1 RN4.8 U$8.P$2
N$51: RN3.2 RN4.7 U$7.P$2
N$52: IC6.22 U$18.P$1
N$53: IC6.21 U$18.P$33
N$54: IC6.23 U$18.P$41
N$55: IC6.25 U$18.P$49
N$56: IC6.27 U$18.P$57
N$57: IC6.18 R9.1
N$58: IC1.21 U14.2
N$59: IC1.22 U14.4
N$60: R1.2 U$16.26
N$61: C55.1 U$16.2
N$62: C55.2 U$16.3
N$63: C37.1 U$16.4
N$64: C37.2 U$16.5
N$65: C54.2 U$16.28
N$66: C53.1 U$16.27
N$67: IC1.23 U14.6
N$68: IC1.24 U14.8
N$69: C51.1 RN4.4 U14.9
N$70: C56.1 RN4.3 U14.5
N$71: C57.1 RN4.2 U14.3
N$72: C58.1 RN4.1 U14.1
OUT: C18.1 C22.1 D1.A U6.5
REGOUT: C16.1 U4.10
RPM_IN: R49.1 U$9.4
RX_GPS: U1.16 U$3.20
SCK: J1.5 JP2.7 U1.20 U$4.TFT_SCK U$16.18
SCL_3V3: IC1.12 IC3.1 R22.2 U1.32 U9.7
SCL_3V3_MPU9250_N2: R34.2 U4.23 U11.32
SCL_3V3_N2: R19.2 U7.7 U11.26
SCL_BUFFERED: PAD1.1 R16.2 RJ45_MAIN_BOARD.P$4 U5.5 U5.6 U7.5 U7.6 U9.5 U9.6 U$18.P$8 U$18.P$16 U$18.P$24 U$18.P$32 U$18.P$40 U$18.P$48 U$18.P$56 U$18.P$64
SCL_MCP: IC6.12 R13.2 U5.7
SDA_3V3: IC1.13 IC3.3 R21.2 U1.31 U9.1
SDA_3V3_MPU9250_N2: R33.2 U4.24 U11.31
SDA_3V3_N2: R20.2 U7.1 U11.25
SDA_BUFFERED: PAD5.1 R15.2 RJ45_MAIN_BOARD.P$3 U5.2 U5.3 U7.2 U7.3 U9.2 U9.3 U$18.P$2 U$18.P$10 U$18.P$18 U$18.P$26 U$18.P$34 U$18.P$42 U$18.P$50 U$18.P$58
SDA_MCP: IC6.13 R25.2 U5.1
SQR_OPT_IN: R50.1 U$9.3
SW: C42.2 D2.C IC2.6 L4.P$1
SWCLK: JTAG.4 U1.45
SWCLK_N2: JTAG1.4 U11.45
SWDIO: JTAG.2 U1.46
SWDIO_N2: JTAG1.2 U11.46
THROTTLE_IN: RN5.7 U$15.3
TX_GPS: U1.15 U$3.21
USB_D+: CN2.D+ U1.34 U2.2
USB_D+_N2: CN1.D+ U11.34
USB_D-: CN2.D- U1.33 U2.3
USB_D-_N2: CN1.D- U11.33
USBVCC: C27.+ F1.1 R4.2 T1.1
VBAT: C6.2 IC5.3 U$3.22 U$17.+
VDDANA: C12.1 C26.1 L1.2 U1.6
VDDANA1: C14.1 C38.1 L3.2 U11.6
VIN: C41.+ D5.C IC2.5 PC1.+ R3.1 R7.1
VUSB [usbvcc]: C31.1 CN2.VBUS F1.2 U2.4
VUSB2: C50.1 CN1.VBUS R23.2 U6.1